# Altium PCB PCB.PcbDoc (part 1 of 2)
Units mm, origin at the board's own origin, x right, y up, seen from the top; angles counter-clockwise.
Board outline 180 x 79 mm, 2 copper layers (Top Layer, Bottom Layer); 169 components, 170 nets, 770 pads, 214 vias.
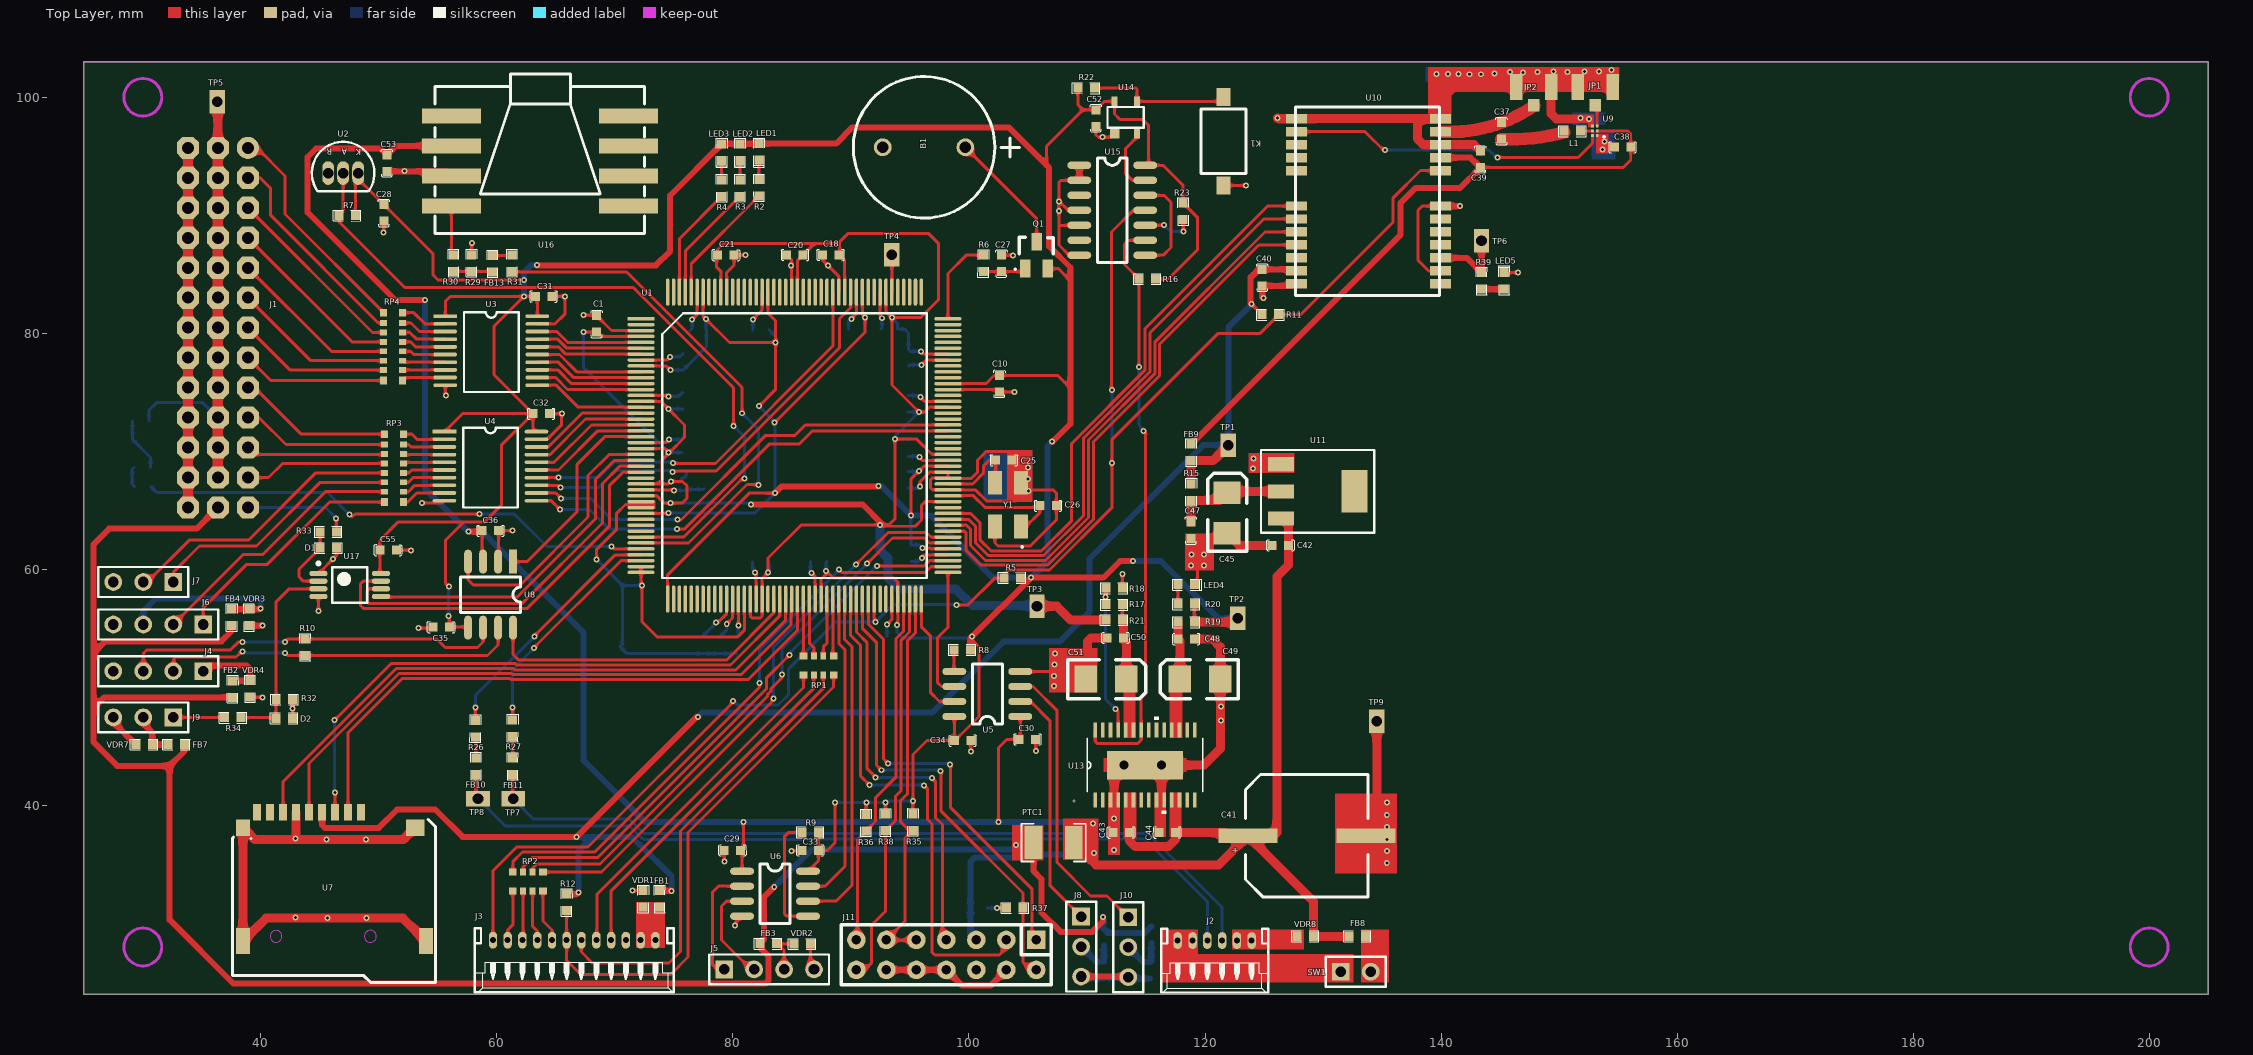
[diagram p0: Top Layer view]
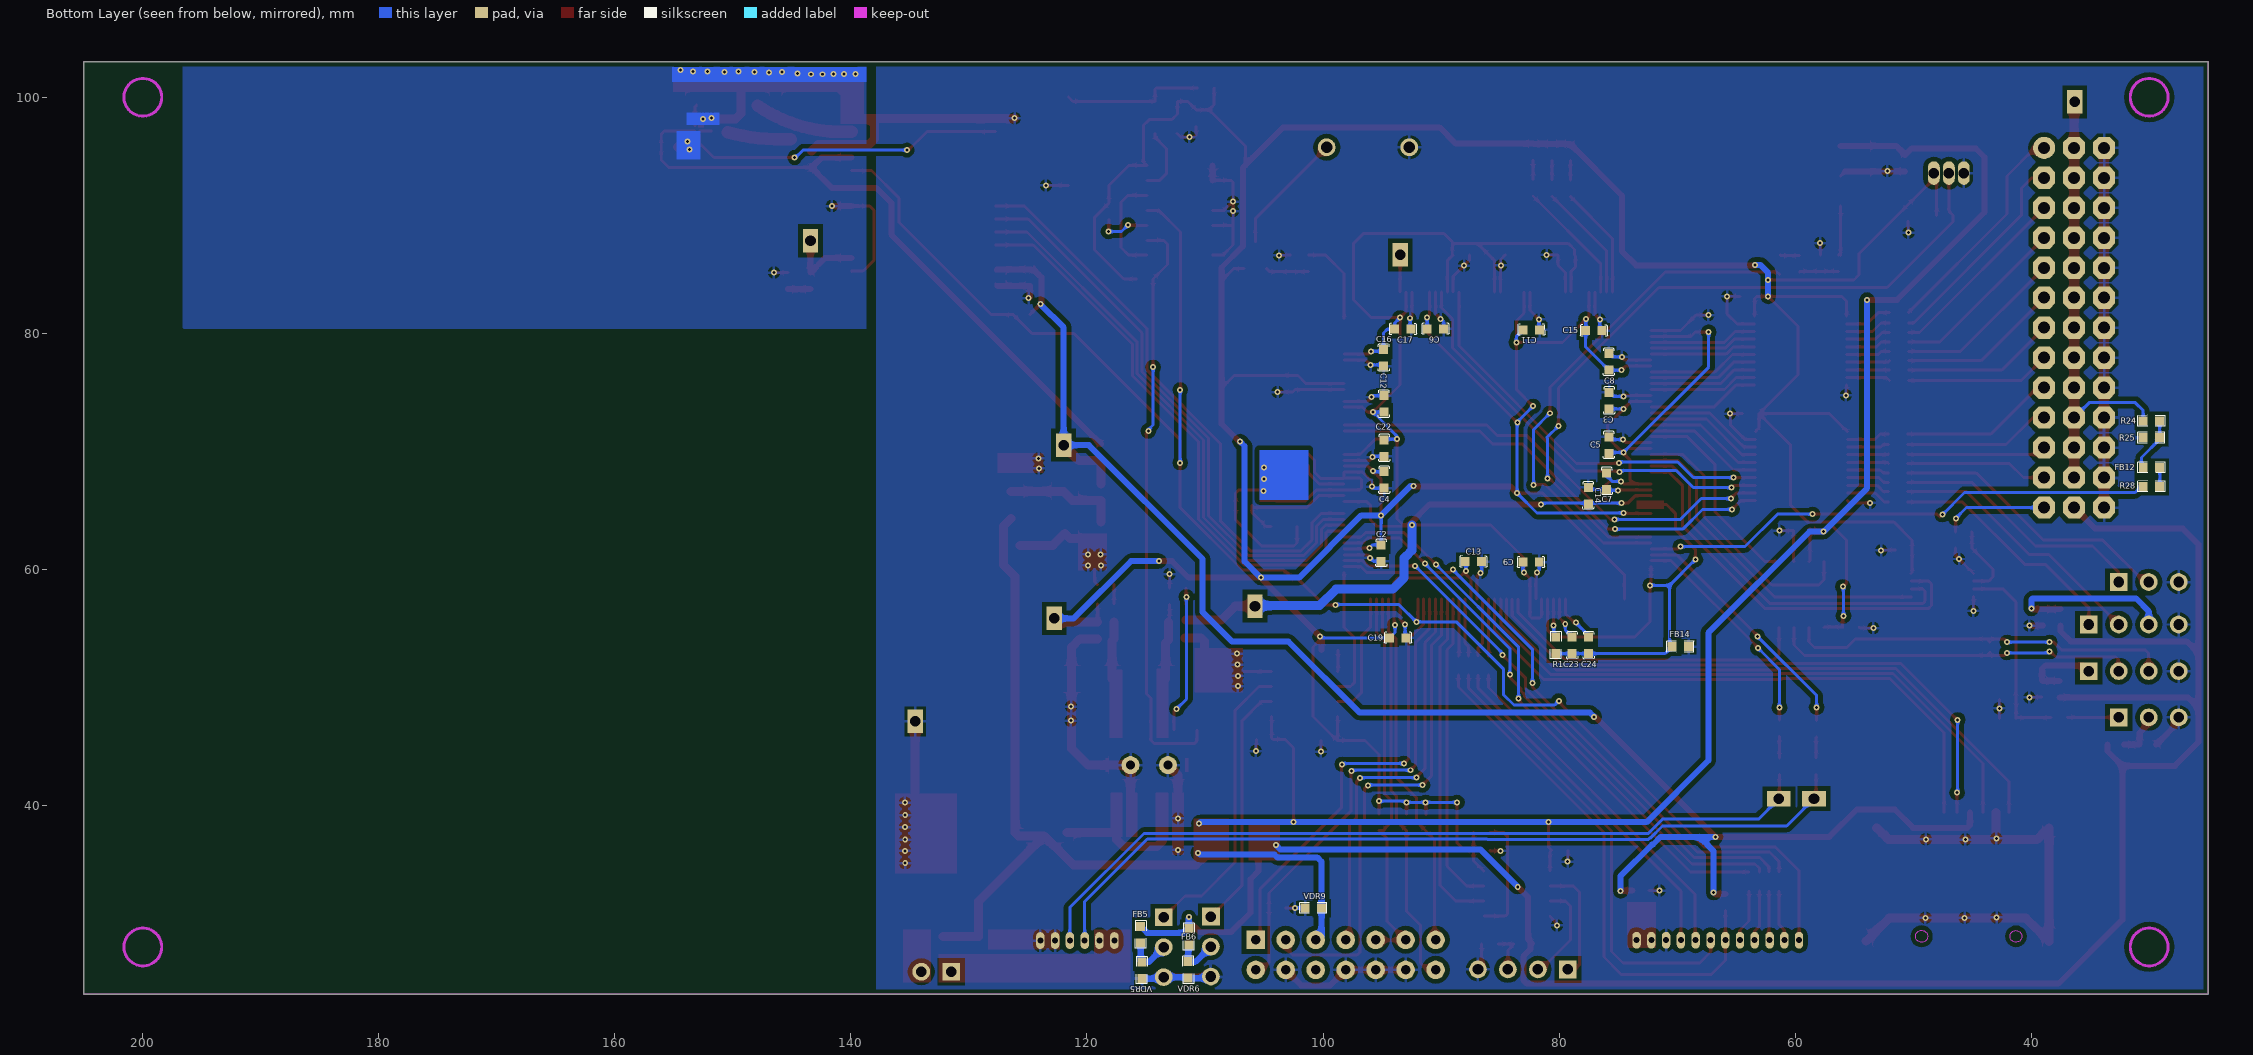
[diagram p1: Bottom Layer view, seen from below]

## Layer stack, top to bottom
Top Solder: solder mask 0.0102, Solder Resist, Dk 3.5
Top Layer: signal copper 0.0356
Dielectric 1: dielectric 0.32, FR-4, Dk 4.8
Bottom Layer: signal copper 0.0356
Bottom Solder: solder mask 0.0102, Solder Resist, Dk 3.5

## Board outline
25,24 205,24 205,103 25,103

## Design rules (kind name [scope] priority, off if disabled: settings)
Clearance [All] p1: gap=0.127
HoleToHoleClearance [All] p1: gap=0.127 allowstackedmicrovias=TRUE
MinimumSolderMaskSliver [All] p1: minsoldermaskwidth=0
PlaneConnect [All] p1: planeconnectstyle=Relief reliefexpansion=0.762 reliefentries=4 reliefconductorwidth=0.762 reliefairgap=0.127
PolygonConnect [All] p1: connectstyle=Relief reliefconductorwidth=0.254 reliefentries=4 polygonreliefangle="90 Angle" airgapwidth=0.254
RoutingVias [All] p1: holewidth=0.381 width=0.635 viastyle="Through Hole" minholewidth=0.254 minwidth=0.508 maxholewidth=0.711 maxwidth=1.27
SilkToSilkClearance [All] p1: silktosilkclearance=0
SilkToSolderMaskClearance [IsPad] p1: minsilkscreentomaskgap=0 clearancetoexposedcopper=TRUE
SolderMaskExpansion [All] p1: expansion=0.102
UnpouredPolygon [All] p1: allowunpoured=FALSE
Width [All] p1: maxlimit=1.27 minlimit=0.127 preferedwidth=0.254
24 further rules are at their usual default settings.

## Classes and differential pairs
component class AD: FB8 R18 R24 R25 R26 R27 R28 U12 U16
component class F28335: B1 C1 C2 C3 C4 C5 C7 C8 C9 C10 C11 C12 C13 C14 C15 C16 C17 C19 C20 C21 C22 C23 C24 C27 C28 FB14 LED1 LED2 LED3 Q1 R1 R2 R3 R4 R5 R6 R7 RP1 U1 U2 Y1
component class GPS: R11
component class IO: J1 TP1 TP2 TP3 TP4 TP5 TP6 TP7 TP8
component class POWER: C41 C42 C43 C44 C45 C46 C49 C52 FB8 K1 LED4 R15 R16 R17 R18 R19 R20 U11 U12 U13 U14 VDR8
component class PWM&CAN&SD: C29 C30 C31 C32 C33 C34 C35 C36 R8 R9 R10 RP3 U3 U4 U5 U6 U7 U8
component class SBUS&JTAG: C55 D1 D2 J11 R33 R34 RP5 U17 U18 VDR9

## Components (designator, comment, footprint, x,y, rotation, side; value= is the part's Value field where it differs from the comment)
B1 "BUZZER" BEEP 99.695,95.758 r180 top
C1 "0.1uF" 0603C 68.45,80.1 r90 top
C2 "0.1uF" 0603C 95.075,62.075 r270 bottom
C3 "0.1uF" 0603C 75.75,73.6 r90 bottom
C4 "0.1uF" 0603C 94.825,68.275 r270 bottom
C5 "0.1uF" 0603C 75.775,69.825 r90 bottom
C6 "0.1uF" 0603C 91.175,80.375 r180 bottom
C7 "0.1uF" 0603C 75.975,68.175 r270 bottom
C8 "0.1uF" 0603C 75.775,76.875 r90 bottom
C9 "0.1uF" 0603C 83.075,60.6 r180 bottom
C10 "0.1uF" 0603C 102.575,76.425 r270 top
C11 "0.1uF" 0603C 83.05,80.3 r180 bottom
C12 "0.1uF" 0603C 94.85,73.325 r90 bottom
C13 "0.1uF" 0603C 87.95,60.65 r180 bottom
C14 "0.1uF" 0603C 77.525,65.55 r90 bottom
C15 "0.1uF" 0603C 77.75,80.225 r180 bottom
C16 "0.1uF" 0603C 94.875,78.625 r270 bottom
C17 "0.1uF" 0603C 93.925,80.35 r180 bottom
C18 "0.1uF" 0603C 88.975,86.65 r180 top
C19 "0.1uF" 0603C 94.35,54.2 r180 bottom
C20 "0.1uF" 0603C 85.95,86.65 r180 top
C21 "0.1uF" 0603C 78.7,86.625 r0 top
C22 "0.1uF" 0603C 94.825,70.975 r270 bottom
C23 "2.2uF" 0603C 78.883,54.26 r270 bottom
C24 "2.2uF" 0603C 77.486,54.26 r270 bottom
C25 "24pF" 0603C 103.65,69.25 r180 top
C26 "24pF" 0603C 107.4,65.4 r180 top
C27 "0.1uF" 0603C 102.743,86.614 r270 top
C28 "0.1uF" 0603C 50.425,89.5 r90 top
C29 "0.1uF" 0603C 79.248,36.195 r0 top
C30 "0.1uF" 0603C 105.65,45.6 r180 top
C31 "0.1uF" 0603C 64.65,83.125 r180 top
C32 "0.1uF" 0603C 64.445,73.192 r180 top
C33 "0.1uF" 0603C 85.852,36.195 r0 top
C34 "0.1uF" 0603C 100.154,45.498 r180 top
C35 "0.1uF" 0603C 54.575,55.1 r0 top
C36 "0.1uF" 0603C 60.15,63.275 r180 top
C37 "1nF" 0603C 145.125,96.45 r90 top
C38 "0.1uF" 0603C 156.075,95.775 r180 top
C39 "0.1uF" 0603C 143.325,94.05 r90 top
C40 "0.1uF" 0603C 124.85,84.025 r90 top
C41 "470uF/16V" 10*10/G/470uF 128.626,37.419 r180 top
C42 "0.1uF" 0603C 125.686,62.034 r0 top
C43 "0.1uF" 0603C 112.2,37.7 r0 top
C44 "10uF" 0603C 116.1,37.7 r0 top
C45 "22uF/6.3V" 3528/B 121.876,63.05 r90 top
C47 "0.1uF" 0603C 118.8,62.6 r90 top
C48 "0.1uF" 0603C 119.1,54.1 r180 top
C49 "10uF/6.3V" 3528/B 121.3,50.7 r180 top
C50 "0.1uF" 0603C 111.7,54.2 r0 top
C51 "10uF/6.3V" 3528/B 109.9,50.7 r0 top
C52 "0.1uF" 0603C 110.744,97.536 r90 top
C53 "0.1uF" 0603C 50.673,93.726 r90 top
C55 "0.1uF" 0603C 50.075,61.625 r0 top
D1 "82306050029" 0603R 45.025,61.8 r0 top
D2 "82306050029" 0603R 41.272,47.375 r0 top
FB1 "742792625" 0603-FB 73.787,32.067 r90 top
FB2 "742792625" 0603-FB 37.6,49.85 r270 top
FB3 "742792625" 0603-FB 82.975,28.275 r180 top
FB4 "742792625" 0603-FB 37.525,55.925 r270 top
FB5 "742792625" 0603-FB 115.45,29.05 r90 bottom
FB6 "742792625" 0603-FB 111.375,28.875 r90 bottom
FB7 "742792625" 0603-FB 32.837,45.149 r0 top
FB8 "742792625" 0603-FB 132.901,28.9 r180 top
FB9 "742792625" 0603-FB 118.828,69.908 r90 top
FB10 "742792625" 0603-FB 58.225,43.325 r90 top
FB11 "742792625" 0603-FB 61.332,43.306 r90 top
FB12 "742792625" 0603-FB 29.8,68.625 r180 bottom
FB13 "742792625" 0603-FB 59.628,85.888 r90 top
FB14 "742792625" 0603-FB 69.725,53.45 r0 bottom
J1 "HEAD3X12" 3X13RA 24.638,79.248 r0 top
J2 "POWER_5V" 53048-06 120.777,27.178 r180 top
J3 "iSensor" 53048-12 66.548,28.575 r180 top
J4 "UART" SIP4 35.115,51.375 r180 top
J5 "I2C" SIP4 79.252,26.098 r0 top
J6 "UART" SIP4 35.115,55.325 r180 top
J7 "UART" SIP3 32.575,58.925 r180 top
J8 "CAP1" SIP3 109.5,30.575 r270 top
J9 "UART" SIP3 32.575,47.45 r180 top
J10 "CAP2" SIP3 113.5,30.525 r270 top
J11 "JTAG" IDC14 105.7,28.6 r270 top
JP1 "ANTINA(NC)" IPEX-20279-00E-03 150.495,98.552 r270 top
JP2 "ANTINA(NC)" IPEX-20279-00E-03 145.288,98.552 r270 top
K1 "RESET_Key" "3*6*2.5 SMD" 121.575,92.525 r90 top
L1 "7.5nH/LQP18M" 0603L 151.13,97.128 r180 top
LED1 "RED" 0603D 82.201,96.076 r270 top
LED2 "GRREN" 0603D 80.6,96.051 r270 top
LED3 "BLUE" 0603D 79.05,96.05 r270 top
LED4 "RED" 0603D 117.708,58.698 r0 top
LED5 "BLUE" 0603D 145.345,83.743 r90 top
PTC1 "0ZCH0150FF2E" 1210 108.875,36.85 r180 top
Q1 "8550" SOT23-PNP 104.775,85.471 r0 top
R1 "24.9K/1%" 0603R 80.28,52.863 r90 bottom
R2 "1K" 0603R 82.201,91.631 r90 top
R3 "1K" 0603R 80.6,91.606 r90 top
R4 "1K" 0603R 79.05,91.605 r90 top
R5 "10K" 0603R 102.95,59.275 r0 top
R6 "1K" 0603R 101.219,86.614 r270 top
R7 "10K" 0603R 48,89.975 r180 top
R8 "10K" 0603R 98.725,53.175 r0 top
R9 "10K" 0603R 85.852,37.719 r0 top
R10 "120" 0603R 43.75,52.7 r90 top
R11 "10K" 0603R 124.85,81.575 r0 top
R12 "10K" 0603R 65.9,32.475 r270 top
R15 "0" 0603R 118.828,67.241 r270 top
R16 "10K" 0603R 114.4,84.6 r0 top
R17 "18.2K/1%" 0603R 113,57 r180 top
R18 "30.1K/1%" 0603R 113,58.4 r180 top
R19 "0" 0603R 119.105,55.523 r180 top
R20 "10K" 0603R 117.708,57.047 r0 top
R21 "0" 0603R 111.6,55.7 r0 top
R22 "10K" 0603R 110.625,100.775 r180 top
R23 "10K" 0603R 118.15,89.625 r90 top
R24 "2K/0.1%" 0603R 30.5,72.575 r180 bottom
R25 "1K/0.1%" 0603R 29.125,71.15 r0 bottom
R26 "10K/0.1%" 0603R 58.175,47.2 r270 top
R27 "10K/0.1%" 0603R 61.331,47.241 r270 top
R28 "10K/0.1%" 0603R 30.5,67.025 r180 bottom
R29 "1K/0.1%" 0603R 57.85,86.65 r270 top
R30 "667/0.1%" 0603R 56.326,85.253 r90 top
R31 "10K/0.1%" 0603R 61.279,85.253 r90 top
R32 "10K" 0603R 41.302,48.971 r0 top
R33 "220" 0603R 46.4,63.175 r180 top
R34 "220" 0603R 36.928,47.425 r0 top
R35 "10K" 0603R 95.25,39.275 r270 top
R36 "10K" 0603R 91.275,39.225 r270 top
R37 "10K" 0603R 103.2,31.3 r0 top
R38 "10K" 0603R 92.925,39.25 r270 top
R39 "1K" 0603R 143.44,83.743 r90 top
RP1 "YC164/220" YC164 85.979,51.054 r0 top
RP2 "YC164/220" YC164 61.35,32.75 r0 top
RP3 "YC248/120" YC248 51.275,68.575 r270 top
RP4 "YC248/220" YC248 51.2,78.875 r270 top
SW1 "SW_POWER" SIP2 131.5,25.9 r0 top
TP1 "PAD" test 122,70.475 r0 top
TP2 "PAD" test 122.8,55.8 r0 top
TP3 "PAD" test 105.75,56.925 r180 top
TP4 "PAD" test 93.475,86.6 r0 top
TP5 "PAD" test 36.322,99.568 r0 top
TP6 "PAD" test 143.45,87.8 r0 top
TP7 "PAD" test 61.332,40.531 r270 top
TP8 "PAD" test 58.35,40.55 r270 top
TP9 "PAD" test 134.575,47.075 r0 top
U1 "TMS320F28335" LQFP-176 85.217,70.485 r0 top
U2 "DS18B20" TO-92 45.7,93.575 r180 top
U3 "74HC245" SSOP20 55.625,81.45 r0 top
U4 "74HC245" SSOP20 55.555,71.668 r0 top
U5 "NLSX4373" SO8 104.345,47.53 r180 top
U6 "NLSX4373" SO8 80.772,34.417 r0 top
U7 "MICROSD_SPI" microsd 38.481,38.1 r0 top
U8 "MC33901" SOIC-8 59.459,57.856 r270 top
U9 "BGA725L6" BGA725L6 153.035,97.155 r180 top
U10 "ubox-M8N" ublox-M8 133.858,91.186 r0 top
U11 "AMS1117-3.3V" SOT223 134.576,70.162 r270 top
U13 "TPS767D301" TPS767D301 114.914,43.406 r90 top
U14 "IMP811" IMP811 113.284,98.171 r0 top
U15 "74HC08D" SO14 109.347,94.234 r0 top
U16 "MPXV7002DP" MPXV7002DP 56.134,98.425 r0 top
U17 "74LVC2G240" VSSOP-8 47.525,58.675 r0 top
VDR1 "82536040" 0603R 72.39,32.766 r270 top
VDR2 "82536040" 0603R 86.555,28.257 r180 top
VDR3 "82536040" 0603R 39,55.225 r90 top
VDR4 "82536040" 0603R 39.075,49.175 r90 top
VDR5 "82536040" 0603R 115.35,25.325 r90 bottom
VDR6 "82536040" 0603R 111.425,26.75 r270 bottom
VDR7 "82536040" 0603R 29.408,45.149 r0 top
VDR8 "82536040" 0603R 127.8,28.9 r0 top
VDR9 "82536040" 0603R 101.525,31.3 r180 bottom
Y1 "30M" 5032Y 103.3,65.475 r90 top

## Footprints (in the part's own frame and the unit in brackets; to place one, negate y for a bottom-side part, rotate by r counter-clockwise, add the part's x,y. Pads: shape width x height; smd on the part's side, far side on the other; paste and mask are expansions set on the pad)
"3*6*2.5 SMD" [mm]
  rect 1.5x1.2 smd: 1(0,0) 2(7.5,0)
  silkscreen extent 1.02,-1.91 6.48,1.91
3X13RA [mil]
  round 74 hole 40: 1(561.38,648.23)
  oct 74x74 hole 40: 2(461.38,648.23) 3(361.38,648.23) 4(561.38,548.23) 5(461.38,548.23) 6(361.38,548.23) 7(561.38,448.23) 8(461.38,448.23) 9(361.38,448.23) 10(561.38,348.23) 11(461.38,348.23) 12(361.38,348.23) 13(561.38,248.23) 14(461.38,248.23) 15(361.38,248.23) 16(561.38,148.23) 17(461.38,148.23) 18(361.38,148.23) 19(561.38,48.23) 20(461.38,48.23) 21(361.38,48.23) 22(561.38,-51.77) 23(461.38,-51.77) 24(361.38,-51.77) 25(561.38,-151.77) 26(461.38,-151.77) 27(361.38,-151.77) 28(561.38,-251.77) 29(461.38,-251.77) 30(361.38,-251.77) 31(561.38,-351.77) 32(461.38,-351.77) 33(361.38,-351.77) 34(561.38,-451.77) 35(461.38,-451.77) 36(361.38,-451.77) 37(561.38,-551.77) 38(461.38,-551.77) 39(361.38,-551.77)
10*10/G/470uF [mm]
  rect 5x1.2 smd: 1(5,0) 2(-5,0)
  silkscreen extent -5.2,-5.2 5.2,5.2
0603-FB [mil]
  rect 30x30 smd: 1(-27.5,0) 2(27.5,0)
  silkscreen extent -46,-18 46,18
0603C [mil]
  rect 30x30 smd: 1(0,0) 2(55,0)
  silkscreen extent -19,-18 73,19
0603D [mil]
  rect 30x30 smd: 1(0,0) 2(55,0)
  silkscreen extent -18,-18 79,18
0603L [mil]
  rect 30x30 smd: 1(-27.5,0) 2(27.5,0)
  silkscreen extent -46,-18 46,18
0603R [mil]
  rect 30x30 smd: 1(0,0) 2(55,0)
  silkscreen extent -18,-18 73,18
1210 [mm]
  rect 1.5x2.8 smd: 1(0,0) 2(3.4,0)
  silkscreen extent -1.02,-1.6 4.42,1.6
3528/B [mil]
  rect 75x90 smd: 1(135,0) 2(0,0)
  silkscreen extent -60,-65 200,65
5032Y [mm]
  rect 2x1.2 smd: 1(-1.85,-1.1) 2(-1.85,1.1) 3(1.85,1.1) 4(1.85,-1.1)
  silkscreen extent -3.6,-1.23 -3.56,-1.18
53048-06 [mil]
  oval 28x56 hole 20: 1(122.03,-53.7) 2(72.03,-53.7) 3(23.03,-53.7) 4(-26.57,-53.7) 5(-75.79,-53.7) 6(-125,-53.7)
  silkscreen extent -180,-93 177,120
53048-12 [mil] "1.25"
  oval 28x56 hole 20: 1(270.93,0) 2(221.93,0) 3(172.93,0) 4(122.93,0) 5(73.93,0) 6(24.93,0) 7(-24.07,0) 8(-74.07,0) 9(-123.29,0) 10(-172.5,0) 11(-221.71,0) 12(-270.93,0)
  silkscreen extent -332,-39 332,173
BEEP [mm]
  round 1.5 hole 1: 1(0.004,-0.004) 2(7.004,-0.004)
  silkscreen extent -4.6,-6 9.5,6
BGA725L6 [mm]
  rect 0.25x0.25 smd: 1(-0.2,0.4) 2(-0.2,0) 3(-0.2,-0.4) 4(0.2,-0.4) 5(0.2,0) 6(0.2,0.4)
  silkscreen extent -0.8,0.48 -0.75,0.53, body extent -0.35,-0.55 0.35,0.55, height 0.4
IDC14 [mil]
  rect 62x62 hole 32: 1(0,0)
  round 62 hole 32: 2(100,0) 3(0,-100) 4(100,-100) 5(0,-200) 6(100,-200) 7(0,-300) 8(100,-300) 9(0,-400) 10(100,-400) 11(0,-500) 12(100,-500) 13(0,-600) 14(100,-600)
  silkscreen extent -50,-650 150,50
IMP811 [mm]
  rect 0.8x0.8 smd: 1(-0.923,-1.25)
  rect 0.5x0.8 smd: 2(0.952,-1.25) 3(0.952,1.475) 4(-0.948,1.475)
  silkscreen extent -1.55,-0.77 1.53,1
IPEX-20279-00E-03 [mm]
  rect 2.2x1.05 smd: 1(-2.3,4.05) 1(-2.3,1.1)
  rect 1.05x1 smd: 2(-0.775,2.575)
LQFP-176 [mm]
  rect 2.3x0.3 smd: 1(-13,10.75)
  oval 2.3x0.3 smd: 2(-13,10.25) 3(-13,9.75) 4(-13,9.25) 5(-13,8.75) 6(-13,8.25) 7(-13,7.75) 8(-13,7.25) 9(-13,6.75) 10(-13,6.25) 11(-13,5.75) 12(-13,5.25) 13(-13,4.75) 14(-13,4.25) 15(-13,3.75) 16(-13,3.25) 17(-13,2.75) 18(-13,2.25) 19(-13,1.75) 20(-13,1.25) 21(-13,0.75) 22(-13,0.25) 23(-13,-0.25) 24(-13,-0.75) 25(-13,-1.25) 26(-13,-1.75) 27(-13,-2.25) 28(-13,-2.75) 29(-13,-3.25) 30(-13,-3.75) 31(-13,-4.25) 32(-13,-4.75) 33(-13,-5.25) 34(-13,-5.75) 35(-13,-6.25) 36(-13,-6.75) 37(-13,-7.25) 38(-13,-7.75) 39(-13,-8.25) 40(-13,-8.75) 41(-13,-9.25) 42(-13,-9.75) 43(-13,-10.25) 44(-13,-10.75) 89(13,-10.75) 90(13,-10.25) 91(13,-9.75) 92(13,-9.25) 93(13,-8.75) 94(13,-8.25) 95(13,-7.75) 96(13,-7.25) 97(13,-6.75) 98(13,-6.25) 99(13,-5.75) 100(13,-5.25) 101(13,-4.75) 102(13,-4.25) 103(13,-3.75) 104(13,-3.25) 105(13,-2.75) 106(13,-2.25) 107(13,-1.75) 108(13,-1.25) 109(13,-0.75) 110(13,-0.25) 111(13,0.25) 112(13,0.75) 113(13,1.25) 114(13,1.75) 115(13,2.25) 116(13,2.75) 117(13,3.25) 118(13,3.75) 119(13,4.25) 120(13,4.75) 121(13,5.25) 122(13,5.75) 123(13,6.25) 124(13,6.75) 125(13,7.25) 126(13,7.75) 127(13,8.25) 128(13,8.75) 129(13,9.25) 130(13,9.75) 131(13,10.25) 132(13,10.75)
  oval 0.3x2.3 smd: 45(-10.75,-13) 46(-10.25,-13) 47(-9.75,-13) 48(-9.25,-13) 49(-8.75,-13) 50(-8.25,-13) 51(-7.75,-13) 52(-7.25,-13) 53(-6.75,-13) 54(-6.25,-13) 55(-5.75,-13) 56(-5.25,-13) 57(-4.75,-13) 58(-4.25,-13) 59(-3.75,-13) 60(-3.25,-13) 61(-2.75,-13) 62(-2.25,-13) 63(-1.75,-13) 64(-1.25,-13) 65(-0.75,-13) 66(-0.25,-13) 67(0.25,-13) 68(0.75,-13) 69(1.25,-13) 70(1.75,-13) 71(2.25,-13) 72(2.75,-13) 73(3.25,-13) 74(3.75,-13) 75(4.25,-13) 76(4.75,-13) 77(5.25,-13) 78(5.75,-13) 79(6.25,-13) 80(6.75,-13) 81(7.25,-13) 82(7.75,-13) 83(8.25,-13) 84(8.75,-13) 85(9.25,-13) 86(9.75,-13) 87(10.25,-13) 88(10.75,-13) 133(10.75,13) 134(10.25,13) 135(9.75,13) 136(9.25,13) 137(8.75,13) 138(8.25,13) 139(7.75,13) 140(7.25,13) 141(6.75,13) 142(6.25,13) 143(5.75,13) 144(5.25,13) 145(4.75,13) 146(4.25,13) 147(3.75,13) 148(3.25,13) 149(2.75,13) 150(2.25,13) 151(1.75,13) 152(1.25,13) 153(0.75,13) 154(0.25,13) 155(-0.25,13) 156(-0.75,13) 157(-1.25,13) 158(-1.75,13) 159(-2.25,13) 160(-2.75,13) 161(-3.25,13) 162(-3.75,13) 163(-4.25,13) 164(-4.75,13) 165(-5.25,13) 166(-5.75,13) 167(-6.25,13) 168(-6.75,13) 169(-7.25,13) 170(-7.75,13) 171(-8.25,13) 172(-8.75,13) 173(-9.25,13) 174(-9.75,13) 175(-10.25,13) 176(-10.75,13)
  silkscreen extent -11.21,-11.21 11.21,11.21
microsd [mm]
  rect 0.7x1.4 smd: 1(10,1.3) 2(8.9,1.3) 3(7.8,1.3) 4(6.7,1.3) 5(5.6,1.3) 6(4.5,1.3) 7(3.4,1.3) 8(2.3,1.3) 9(1.2,1.3)
  rect 1.2x1.4 smd: 10(0,0)
  rect 1.2x2.2 smd: 10(0,-9.6) 10(15.5,-9.6)
  rect 1.6x1.4 smd: 10(14.6,0)
  Keep-Out Layer circle w0.05: c10.8,-9.2 r0.51
  Keep-Out Layer circle w0.05: c2.8,-9.2 r0.5
  silkscreen extent -0.9,-13.1 16.3,0.7
MPXV7002DP [mm]
  rect 5x1.27 smd: 1(0,0) 2(0,-2.54) 3(0,-5.08) 4(0,-7.62) 5(15,-7.62) 6(15,-5.08) 7(15,-2.54) 8(15,0)
  silkscreen extent -1.39,-9.97 16.39,3.54
SIP2 [mm]
  rect 1.5x1.5 hole 0.9: 1(0,0)
  round 1.5 hole 0.9: 2(2.54,0)
  silkscreen extent -1.27,-1.27 3.81,1.27
SIP3 [mm]
  rect 1.5x1.5 hole 0.9: 1(0,0)
  round 1.5 hole 0.9: 2(2.54,0) 3(5.08,0)
  silkscreen extent -1.27,-1.27 6.35,1.27
SIP4 [mm]
  rect 1.5x1.5 hole 0.9: 1(0,0)
  round 1.5 hole 0.9: 2(2.54,0) 3(5.08,0) 4(7.62,0)
  silkscreen extent -1.27,-1.27 8.89,1.27
SO8 [mil]
  oval 80x24 smd: 1(0,0) 2(0,-50) 3(0,-100) 4(0,-150) 5(220,-150) 6(220,-100) 7(220,-50) 8(220,0)
  silkscreen extent 60,-175 160,25
SO14 [mil]
  oval 80x24 smd: 1(0,0) 2(0,-50) 3(0,-100) 4(0,-150) 5(0,-200) 6(0,-250) 7(0,-300) 8(220,-300) 9(220,-250) 10(220,-200) 11(220,-150) 12(220,-100) 13(220,-50) 14(220,0)
  silkscreen extent 60,-325 160,25
SOIC-8 [mm]
  rect 2.03x0.66 smd: 1(-2.795,1.905)
  oval 2.03x0.66 smd: 2(-2.795,0.635) 3(-2.795,-0.635) 4(-2.795,-1.905) 5(2.795,-1.905) 6(2.795,-0.635) 7(2.795,0.635) 8(2.795,1.905)
  silkscreen extent -1.5,-2.54 1.5,2.54
SOT23-PNP [mil]
  rect 36x60 smd: 1(0,0) 2(75,0) 3(38,90)
  silkscreen extent -34,-2 93,105
SOT223 [mm]
  rect 1.2x2.2 smd: 1(1.256,-8.128) 2(3.556,-8.128) 3(5.856,-8.128)
  rect 3.6x2.2 smd: ""(3.556,-1.928)
  silkscreen extent 0.06,-9.83 7.06,-0.23
SSOP20 [mm]
  rect 2x0.32 smd: 1(0,0)
  oval 2x0.32 smd: 2(0,-0.65) 3(0,-1.3) 4(0,-1.95) 5(0,-2.6) 6(0,-3.25) 7(0,-3.9) 8(0,-4.55) 9(0,-5.2) 10(0,-5.85) 11(7.796,-5.85) 12(7.796,-5.2) 13(7.796,-4.55) 14(7.796,-3.9) 15(7.796,-3.25) 16(7.796,-2.6) 17(7.796,-1.95) 18(7.796,-1.3) 19(7.796,-0.65) 20(7.796,0)
  silkscreen extent 1.58,-6.43 6.21,0.33
test [mm]
  rect 1.3x2 hole 0.9: 1(-0.019,0.043)
TO-92 [mm]
  oval 1x2 hole 0.9: 1(0,0) 2(-1.27,0) 3(-2.54,0)
  silkscreen extent -3.92,-2.65 1.38,1.55
TPS767D301 [mil]
  rect 50x12 smd: 1(-117,166.34) 2(-117,140.75) 3(-117,115.16) 4(-117,89.57) 5(-117,63.98) 6(-117,38.39) 7(-117,12.8) 8(-117,-12.8) 9(-117,-38.39) 10(-117,-63.98) 11(-117,-89.57) 12(-117,-115.16) 13(-117,-140.75) 14(-117,-166.34) 15(117,-166.34) 16(117,-140.75) 17(117,-115.16) 18(117,-89.57) 19(117,-63.98) 20(117,-38.39) 21(117,-12.8) 22(117,12.8) 23(117,38.39) 24(117,63.98) 25(117,89.57) 26(117,115.16) 27(117,140.75) 28(117,166.34)
  rect 94.49x254.33 smd: 29(0,0)
  Top Layer region: 22.64,127.17 -22.64,127.17 -22.64,137.01 22.64,137.01
  Top Layer region: 22.64,-127.17 -22.64,-127.17 -22.64,-137.01 22.64,-137.01
  silkscreen extent -162,-193 162,193, body extent -130,-193 130,193, height 67
ublox-M8 [mm]
  rect 1.8x0.8 smd: 1(6.1,-7) 2(6.1,-5.9) 3(6.1,-4.8) 4(6.1,-3.7) 5(6.1,-2.6) 6(6.1,-1.5) 7(6.1,-0.4) 8(6.1,2.6) 9(6.1,3.7) 10(6.1,4.8) 11(6.1,5.9) 12(6.1,7) 13(-6.1,7) 14(-6.1,5.9) 15(-6.1,4.8) 16(-6.1,3.7) 17(-6.1,2.6) 18(-6.1,-0.4) 19(-6.1,-1.5) 20(-6.1,-2.6) 21(-6.1,-3.7) 22(-6.1,-4.8) 23(-6.1,-5.9) 24(-6.1,-7)
  silkscreen extent -6.2,-8 6,8
VSSOP-8 [mm]
  oval 1.55x0.45 smd: 1(-2.65,0.975) 2(-2.65,0.325) 3(-2.65,-0.325) 4(-2.65,-0.975) 5(2.65,-0.975) 6(2.65,-0.325) 7(2.65,0.325) 8(2.65,0.975)
  silkscreen extent -2.77,-1.5 1.48,1.95, body extent -1.5,-1.5 1.5,1.5, height 1.1
YC164 [mm]
  rect 0.65x0.6 smd: 1(0,0) 4(2.55,0) 5(2.55,1.6) 8(0,1.6)
  rect 0.5x0.6 smd: 2(0.875,0) 3(1.675,0) 6(1.675,1.6) 7(0.875,1.6)
YC248 [mm]
  rect 0.65x0.6 smd: 1(-2.875,-0.8) 8(2.875,-0.8) 9(2.875,0.8) 16(-2.875,0.8)
  rect 0.5x0.6 smd: 2(-2,-0.8) 3(-1.2,-0.8) 4(-0.4,-0.8) 5(0.4,-0.8) 6(1.2,-0.8) 7(2,-0.8) 10(2,0.8) 11(1.2,0.8) 12(0.4,0.8) 13(-0.4,0.8) 14(-1.2,0.8) 15(-2,0.8)

## Part data
B1: "Buzzer"
C1 C2 C3 C4 C5 C6 C7 C8 C9 C10 C11 C12 C13 C14 C15 C16 C17 C18 C19 C20 C21 C22 C23 C24 C25 C26 C27 C28 C29 C30 C31 C32 C33 C34 C35 C36 C37 C38 C39 C40 C42 C43 C44 C47 C48 C50 C52 C53 C55: library part C
C41 C45 C49 C51: library part C-POLAR
D1 D2: library part DIODE-TVS/Bidirectional
FB1 FB2 FB3 FB4 FB5 FB6 FB7 FB8 FB9 FB10 FB11 FB12 FB13 FB14: library part FB
J2: library part HEAD1X6
J3: library part HEAD2X6
J4 J5 J6: library part HEAD1X4
J7 J8 J9 J10: library part HEAD1X3
J11: library part IDC-14
JP1 JP2: library part ANTINA
L1: library part L
LED1 LED2 LED3 LED4 LED5: library part LED
PTC1: library part PTC
Q1: library part PNP, "PNP Transistor"
R1 R2 R3 R4 R5 R6 R7 R8 R9 R10 R11 R12 R15 R16 R17 R18 R19 R20 R21 R22 R23 R24 R25 R26 R27 R28 R29 R30 R31 R32 R33 R34 R35 R36 R37 R38 R39: library part R
RP1 RP2: library part RP-4
RP3 RP4: library part RP
U11: library part AS1117M3-3.3V, "5V-3.3V"
U15: "2-INPUT AND GATE"
VDR1 VDR2 VDR3 VDR4 VDR5 VDR6 VDR7 VDR8 VDR9: library part Varistor
Y1: library part CRYSTAL, "Crystal"

## Free pads (board coordinates)
  round 1.524 hole 0.762: 0(113.136,43.406) 1(116.311,43.406)

## Via types
v1: diameter 0.508, hole 0.254, Top Layer to Bottom Layer, 214 vias

## Nets (pads, with @x,y where several pads share a name; then routed paths per layer and width w, separated by ;. In a path a pad name is that pad's centre, name@x,y a point inside that pad or via, vN(x,y) a via of type N, cw(c..) or ccw(c..) an arc to the next point about the centre after c; other vN are vias at no path point)
AGND: C23.2 C24.2 FB14.2 R1.1 U1.32 U1.33 U1.43 U1.44 U1.58 | length 44
  Top Layer w0.254: v1@68.45,60.775 v1(68.45,60.825) 68.45,61.7 70.15,63.4 70.15,64.75 70.9,65.5 72.217,65.5 ; U1.43@72.217,60.235 U1.44@72.217,59.735 72.217,58.708 v1(72.275,58.65) 72.275,55.575 73.575,54.275 80.4,54.275 80.967,54.842 U1.58@80.967,57.485
  Bottom Layer w0.254: v1(68.45,60.825) 70.625,58.65 ; v1(72.275,58.65) 70.625,58.65 ; R1.1@80.28,52.863 C23.2@78.883,52.863 C24.2@77.486,52.863 71.01,52.863 FB14.2@70.423,53.45 70.625,53.651 70.625,58.65
BAT2S_VOLT: J1.2 J1.5 J1.8 J1.11 J1.14 J1.17 J1.20 J1.23 J1.26 J1.29 J1.32 J1.35 R24.1 TP5.1 | length 39.4
  Top Layer w0.762: TP5.1@36.303,99.611 36.357,99.557 J1.2@36.357,95.713 J1.5@36.357,93.173 J1.8@36.357,90.633 J1.11@36.357,88.093 J1.14@36.357,85.553 J1.17@36.357,83.013 J1.20@36.357,80.473 J1.23@36.357,77.933 J1.26@36.357,75.393 J1.29@36.357,72.853 J1.32@36.357,70.313 J1.35@36.357,67.773
  Bottom Layer w0.254: R24.1@30.5,72.575 30.5,73.45 31.175,74.125 35.085,74.125 J1.29@36.357,72.853
BAT6S_VOLT_SENSE: FB11.1 J2.4 TP7.1 | length 68.8
  Top Layer w0.254: FB11.1@61.332,42.607 61.332,40.593 TP7.1@61.375,40.55
  Bottom Layer w0.254: TP7.1@61.375,40.55 63.1,38.825 71.232,38.825 72.432,37.625 115.175,37.625 121.452,31.348 J2.4@121.452,28.542
BAT_CURRENT_SENSE: FB10.1 J2.3 TP8.1 | length 70.9
  Top Layer w0.254: FB10.1@58.225,42.626 58.225,40.737 TP8.1@58.393,40.569
  Bottom Layer w0.254: TP8.1@58.393,40.569 60.712,38.25 71.232,38.25 72.264,37.219 72.336,37.219 72.429,37.125 86.082,37.125 86.115,37.158 114.892,37.158 120.192,31.858 J2.3@120.192,28.542
BATT2S_VOLT_SENSE: R28.1 U1.40 | length 44
  Top Layer w0.254: v1(47.525,64.625) 47.725,64.425 47.975,64.675 v1(58.525,64.675) ; v1(69.725,61.925) 69.915,61.735 U1.40@72.217,61.735
  Bottom Layer w0.254: R28.1@30.675,67.025 31.2,66.5 45.65,66.5 v1@47.6,64.55 ; v1(58.525,64.675) 61.5,64.675 64.25,61.925 v1(69.725,61.925)
BATT6S_VOLT_SENSE: R27.1 U1.42 | length 19
  Top Layer w0.254: v1(61.325,48.275) 61.331,48.269 R27.1@61.331,47.241 ; v1(63.15,53.325) 63.15,53.375 70.51,60.735 U1.42@72.217,60.735
  Bottom Layer w0.254: v1(61.325,48.275) 61.325,51.5 v1(63.15,53.325)
BATT_CURRENT_SENSE: R26.1 U1.41 | length 21.1
  Top Layer w0.254: R26.1@58.175,47.2 v1(58.175,48.3) ; v1(63.2,54.325) 63.2,54.4 70.035,61.235 U1.41@72.217,61.235
  Bottom Layer w0.254: v1(58.175,48.3) 58.175,49.3 v1(63.2,54.325)
CANRXA: 
CANRXB: U1.24 U8.4 | length 23
  Top Layer w0.254: U8.4@57.554,60.651 57.554,59.121 58,58.675 61.975,58.675 67.725,64.425 67.725,67.95 69.51,69.735 U1.24@72.217,69.735
CANSTB: U1.63 U8.8 | length 27.4
  Top Layer w0.254: U8.8@61.364,55.061 61.364,52.789 61.853,52.3 79.45,52.3 83.467,56.317 U1.63@83.467,57.485
CANTH: J4.2 R10.1 U8.7 | length 31.1
  Top Layer w0.254: J4.2@32.575,51.375 32.625,51.425 32.625,52.4 32.8,52.575 37.9,52.575 v1@38.4,53.075 ; v1(42.05,52.925) 42.275,52.7 R10.1@43.75,52.7 ; R10.1@43.475,52.975 R10.1@43.75,52.7 ; U8.7@60.094,55.061 60.094,53.594 59.2,52.7 R10.1@43.75,52.7
  Bottom Layer w0.254: v1(38.425,53.025) 38.525,52.925 v1(42.05,52.925)
CANTL: J4.3 R10.2 U8.6 | length 32.9
  Top Layer w0.254: J4.3@30.035,51.375 30.035,52.86 30.35,53.175 37.425,53.175 38.075,53.825 v1@38.45,53.825 ; v1@42.003,53.825 v1(42.025,53.825) 42.297,54.097 R10.2@43.75,54.097 ; R10.2@43.478,53.825 R10.2@43.75,54.097 ; U8.6@58.824,55.061 58.824,53.849 58.35,53.375 55.625,53.375 54.903,54.097 R10.2@43.75,54.097
  Bottom Layer w0.254: v1(38.425,53.825) v1(42.025,53.825)
CANTXA: 
CANTXB: U1.21 U8.1 | length 17.6
  Top Layer w0.254: U8.1@61.364,60.651 62.551,60.651 66.8,64.9 66.8,68.9 69.135,71.235 U1.21@72.217,71.235
CAP1: J8.1 U5.2 | length 20.9
  Top Layer w0.254: U5.2@104.345,48.8 105.225,48.8 106.85,47.175 106.85,33.225 J8.1@109.5,30.575
CAP2: J10.1 U5.3 | length 24.8
  Top Layer w0.254: U5.3@104.345,50.07 105.43,50.07 107.475,48.025 107.475,35.15 110.3,32.325 111.7,32.325 J10.1@113.5,30.525
DSP_RST: J3.1 R5.1 R11.2 U1.80 U10.8 U15.11 | length 142.5
  Top Layer w0.254: J3.1@59.666,28.575 59.666,34.466 61.675,36.475 67.725,36.475 v1@80.125,48.875 ; U1.80@91.967,57.485 91.967,55.683 v1(92.1,55.55) ; v1(98.95,56.975) 99.9,56.975 102.175,59.25 102.625,59.25 R5.1@102.9,59.525 ; R5.1@102.95,59.275 102.95,59.575 103.301,59.926 106.701,59.926 106.718,59.943 106.826,59.943 112.1,65.217 v1(112.1,69.025) 112.1,70.975 121.125,80 124.672,80 R11.2@126.247,81.575 128.1,81.575 135.95,89.425 135.95,91.475 138.261,93.786 U10.8@139.958,93.786 ; v1@112.1,75.125 112.075,75.15 112.075,88.575 113.924,90.424 U15.11@114.935,90.424
  Bottom Layer w0.254: v1(80.025,48.85) 80.375,48.5 83.825,48.5 84.725,49.4 84.725,51.575 88.7,55.55 v1(92.1,55.55) 93.575,57.025 98.9,57.025 v1@98.925,57 ; v1(112.1,69.025) v1(112.1,75.2)
ECAP5: U1.88 U5.7 | length 10.6
  Top Layer w0.254: U1.88@95.967,57.485 95.967,55.133 96.725,54.375 96.725,49.575 97.5,48.8 U5.7@98.757,48.8
ECAP6: U1.89 U5.6 | length 11.2
  Top Layer w0.254: U1.89@98.217,59.735 98.217,55.092 97.35,54.225 97.35,50.4 97.68,50.07 U5.6@98.757,50.07
EMU0: J11.13 R36.2 U1.85 | length 31.1
  Top Layer w0.254: J11.13@90.56,28 90.56,37.113 R36.2@91.275,37.828 92.075,38.628 92.075,40.65 93.8,42.375 93.8,54.1 94.467,54.767 U1.85@94.467,57.485
EMU1: J11.14 R38.2 U1.86 | length 33.9
  Top Layer w0.254: J11.14@90.56,25.46 91.725,26.625 91.725,29.825 92.925,31.025 R38.2@92.925,37.853 93.775,38.703 93.775,40.775 94.225,41.225 94.225,53.95 94.967,54.692 U1.86@94.967,57.485
EPWM1A: U1.5 U3.18 | length 9.2
  Top Layer w0.254: U3.18@63.421,80.15 65.074,80.15 65.989,79.235 U1.5@72.217,79.235
EPWM1B: U1.6 U3.17 | length 9.1
  Top Layer w0.254: U3.17@63.421,79.5 65.149,79.5 65.914,78.735 U1.6@72.217,78.735
EPWM2A: U1.7 U3.16 | length 9.1
  Top Layer w0.254: U3.16@63.421,78.85 65.225,78.85 65.84,78.235 U1.7@72.217,78.235
EPWM2B: U1.10 U3.15 | length 9.4
  Top Layer w0.254: U3.15@63.421,78.2 65.3,78.2 66.765,76.735 U1.10@72.217,76.735
EPWM3A: U1.11 U3.14 | length 9.3
  Top Layer w0.254: U3.14@63.421,77.55 65.2,77.55 66.515,76.235 U1.11@72.217,76.235
EPWM3B: U1.12 U3.13 | length 9.3
  Top Layer w0.254: U3.13@63.421,76.9 65.15,76.9 66.315,75.735 U1.12@72.217,75.735
EPWM4A: U1.13 U3.12 | length 9.2
  Top Layer w0.254: U3.12@63.421,76.25 64.975,76.25 65.99,75.235 U1.13@72.217,75.235
EPWM4B: U1.16 U3.11 | length 9.6
  Top Layer w0.254: U3.11@63.421,75.6 65.025,75.6 66.89,73.735 U1.16@72.217,73.735
EPWM5A: U1.17 U4.18 | length 10.1
  Top Layer w0.254: U4.18@63.351,70.368 64.343,70.368 67.21,73.235 U1.17@72.217,73.235
EPWM5B: U1.18 U4.17 | length 10.1
  Top Layer w0.254: U4.17@63.351,69.718 64.493,69.718 67.51,72.735 U1.18@72.217,72.735
EPWM6A: U1.19 U4.16 | length 10.2
  Top Layer w0.254: U4.16@63.351,69.068 64.843,69.068 68.01,72.235 U1.19@72.217,72.235
EPWM6B: U1.20 U4.15 | length 10.2
  Top Layer w0.254: U4.15@63.351,68.418 65.218,68.418 68.535,71.735 U1.20@72.217,71.735
GND: B1.2 C1.2 C2.2 C3.2 C4.2 C5.2 C6.2 C7.2 C8.2 C9.2 C10.2 C11.2 C12.2 C13.2 C14.2 C15.2 C16.2 C17.2 C18.2 C19.2 C20.2 C21.2 C22.2 C25.1 C26.1 C27.1 C28.1 C29.1 C30.1 C31.1 C32.1 C33.1 C34.1 C35.1 C36.1 C38.2 C39.2 C40.1 C41.2 C42.1 C43.1 C44.1 C45.2 C47.1 C48.1 C49.2 C50.1 C51.2 C52.1 C53.1 C55.2 D1.2 D2.2 FB14.1 J1.3 J1.6 J1.9 J1.12 J1.15 J1.18 J1.21 J1.24 J1.27 J1.30 J1.33 J1.36 J1.39 J2.5 J2.6 J3.10 J4.4 J5.4 J6.4 J7.3 J8.3 J9.3 J10.3 J11.4 J11.8 J11.10 J11.12 JP1.1 JP2.1 K1.1 LED4.2 LED5.2 pad.0 pad.1 R18.1 R25.2 R29.1 R32.2 R37.1 TP9.1 U1.3 U1.8 U1.14 U1.22 U1.30 U1.60 U1.70 U1.83 U1.92 U1.103 U1.105 U1.106 U1.108 U1.118 U1.120 U1.125 U1.140 U1.144 U1.147 U1.155 U1.160 U1.166 U1.171 U2.1 U3.10 U3.19 U4.10 U4.19 U5.4 U6.4 U7.6 U7.10 U8.2 U9.1 U9.4 U10.2 U10.7 U10.10 U10.12 U10.13 U10.24 U11.1 U13.3 U13.4 U13.9 U13.10 U13.29 U14.1 U15.1 U15.2 U15.4 U15.5 U15.7 U16.3 U17.1 U17.4 VDR1.1 VDR2.1 VDR3.1 VDR4.1 VDR5.1 VDR6.2 VDR7.1 VDR8.1 VDR9.1 Y1.2 Y1.4 | length 389.1
  Top Layer w0.254: J9.3@27.495,47.062 J9.3@27.495,47.45 ; VDR4.1@39.075,49.175 40.125,49.175 v1(40.15,49.15) ; D2.2@42.669,47.375 42.699,47.405 R32.2@42.699,48.971 ; U17.4@44.875,57.7 44.875,56.5 v1(44.9,56.475) ; U17.1@44.875,59.65 46.422,61.197 D1.2@46.422,61.8 ; v1(50.4,88.525) 50.425,88.55 C28.1@50.425,89.5 ; C55.2@51.472,61.625 52.675,61.625 v1(52.7,61.6) ; v1(53.375,55.025) 54.5,55.025 C35.1@54.575,55.1 ; v1(53.65,65.625) 55.362,65.625 U4.10@55.555,65.818 ; U3.10@55.625,75.6 55.625,74.825 v1(55.7,74.75) ; U16.3@55.753,93.726 U16.3@56.134,93.345 ; R29.1@57.85,86.65 57.85,87.625 v1(57.875,87.65) ; U8.2@60.094,60.651 60.15,60.707 C36.1@60.15,63.275 v1(61.325,63.275) ; U4.19@63.351,71.018 64.268,71.018 65.492,72.242 65.492,73.192 C32.1@64.445,73.192 ; U3.19@63.421,80.8 64.925,80.8 65.75,81.625 v1@65.75,83.113 ; C31.1@64.65,83.125 v1(65.75,83.125) ; v1(67.35,81.55) 68.397,81.55 C1.2@68.45,81.497 69.712,80.235 U1.3@72.217,80.235 ; v1(71.5,32.775) 72.381,32.775 VDR1.1@72.39,32.766 ; U1.30@72.217,66.735 74.99,66.735 v1(75.025,66.7) ; U1.22@72.217,70.735 74.31,70.735 v1(74.575,71) ; U1.14@72.217,74.735 74.465,74.735 v1(74.55,74.65) ; U1.8@72.217,77.735 74.41,77.735 v1(74.675,78) ; v1(76.55,81.175) 76.967,81.592 U1.171@76.967,83.485 ; v1@79.225,35.225 v1(79.275,35.225) 79.248,35.252 C29.1@79.248,36.195 ; U1.166@79.467,83.485 79.467,85.142 80.097,85.772 C21.2@80.097,86.625 81.025,86.625 v1(81.05,86.65) ; v1(80.175,29.825) 80.175,30.01 U6.4@80.772,30.607 ; v1(81.7,81.175) 82.467,81.942 U1.160@82.467,83.485 ; v1(81.875,59.75) 81.967,59.658 U1.60@81.967,57.485 ; C20.2@84.553,86.65 84.967,86.236 U1.155@84.967,83.485 ; v1(84.975,36.15) 85.807,36.15 C33.1@85.852,36.195 ; VDR2.1@86.555,28.257 86.555,26.415 J5.4@86.872,26.098 ; v1(86.675,59.675) 86.967,59.383 U1.70@86.967,57.485 ; C18.2@87.578,86.65 87.578,86.222 88.967,84.833 U1.147@88.967,83.485 ; v1(90.025,81.225) 90.467,81.667 U1.144@90.467,83.485 ; U1.140@92.467,83.485 92.467,81.433 v1(92.625,81.275) ; v1(93.05,55.325) 93.467,55.742 U1.83@93.467,57.485 ; v1(95.8,69.5) 96.065,69.235 U1.108@98.217,69.235 ; v1(95.85,67) 95.85,67.425 96.66,68.235 U1.106@98.217,68.235 U1.105@98.217,67.735 ; v1(95.875,74.6) 96.24,74.235 U1.118@98.217,74.235 ; v1(95.975,77.325) 96.385,77.735 U1.125@98.217,77.735 ; v1(96,60.975) 96.26,61.235 U1.92@98.217,61.235 ; U1.120@98.217,75.235 102.368,75.235 C10.2@102.575,75.028 103.847,75.028 v1(103.85,75.025) ; C34.1@100.154,45.498 100.154,44.571 v1(100.175,44.55) ; Y1.2@102.2,63.625 102.2,62.225 102.45,61.975 105.2,61.975 107.4,64.175 C26.1@107.4,65.4 107.4,66.475 107.15,66.725 105.1,66.725 v1(105.025,66.65) ; v1(102.375,31.3) R37.1@103.2,31.3 ; C27.1@102.743,86.614 103.711,86.614 v1(103.725,86.6) ; U5.4@104.345,51.34 107.015,51.34 107.1,51.425 ; C30.1@105.65,45.6 105.65,44.65 v1(105.7,44.6) ; 107.625,89.175 v1@107.625,91.2 ; U15.7@109.347,86.614 108.486,86.614 107.625,87.475 107.625,89.154 U15.5@109.347,89.154 ; U15.4@109.347,90.424 108.401,90.424 v1@107.625,91.2 ; U15.2@109.347,92.964 107.789,92.964 107.625,92.8 v1@107.625,91.2 ; C52.1@110.744,97.536 110.744,96.806 110.925,96.625 112.065,96.625 U14.1@112.361,96.921 ; R18.1@113,58.4 v1(113,59.6) ; LED4.2@119.105,58.698 119.35,58.943 119.35,60.15 ; K1.1@121.575,92.525 v1(123.475,92.525) ; U10.24@127.597,84.025 U10.24@127.758,84.186 ; U10.2@139.897,85.225 U10.2@139.958,85.286 138.964,85.286 138.05,86.2 138.05,90.425 138.411,90.786 U10.7@139.958,90.786 ; v1@141.614,90.786 v1(141.625,90.775) ; LED5.2@145.345,85.14 146.515,85.14 v1(146.525,85.15) ; U1.105@98.217,67.735 96.885,67.735 96.725,67.575 96.725,66.925 96.915,66.735 U1.103@98.217,66.735 100.54,66.735 101.475,65.8 103.975,65.8 104.4,66.225 Y1.4@104.4,67.325 104.4,69.1 104.25,69.25 C25.1@103.65,69.25 103.65,69.8 103.45,70 101.475,70 100.725,69.25 100.725,68.225 100.2,67.7 98.252,67.7 U1.105@98.217,67.735
  Top Layer w0.508: J9.3@27.495,47.062 VDR7.1@29.408,45.149 ; VDR3.1@39,55.225 v1(40.15,55.225) ; C53.1@50.673,93.726 U16.3@55.753,93.726 ; J11.12@93,26.06 J11.10@95.54,26.06 J11.8@98.08,26.06 99.39,24.75 101.85,24.75 J11.4@103.16,26.06 ; U15.2@109.347,92.964 U15.1@109.347,94.234 ; J8.3@109.5,25.495 113.45,25.495 J10.3@113.5,25.445 ; v1(124.95,82.975) 124.85,83.075 C40.1@124.85,84.025 U10.24@127.597,84.025 ; U10.7@139.958,90.786 v1@141.614,90.786
  Top Layer w0.762: J1.39@33.817,65.233 J1.36@33.817,67.773 J1.33@33.817,70.313 J1.30@33.817,72.853 J1.27@33.817,75.393 J1.24@33.817,77.933 J1.21@33.817,80.473 J1.18@33.817,83.013 J1.15@33.817,85.553 J1.12@33.817,88.093 J1.9@33.817,90.633 J1.6@33.817,93.173 J1.3@33.817,95.713 ; U7.6@42.981,39.4 42.981,37.131 v1@42.95,37.1 ; U7.10@53.081,38.1 52.081,37.1 v1@42.95,37.1 ; U7.10@53.981,28.5 52.031,30.45 40.45,30.45 38.481,28.481 U7.10@38.481,38.1 39.481,37.1 v1@42.95,37.1 ; C51.2@109.9,50.7 110.025,50.825 110.025,53.875 110.35,54.2 C50.1@111.7,54.2 ; 112.3,40.5 112.3,42.57 pad.0@113.136,43.406 ; 116.3,40.1 116.311,40.111 pad.1@116.311,43.406 119.906,43.406 121.3,44.8 C49.2@121.3,50.7 121.3,53.4 120.6,54.1 C48.1@119.1,54.1 ; C47.1@118.8,62.6 121.426,62.6 C45.2@121.876,63.05 122.892,62.034 C42.1@125.686,62.034 ; v1(126.125,98.225) 126.164,98.186 U10.13@127.758,98.186 138.411,98.186 ; 134.075,38.225 134.556,38.706 TP9.1@134.556,47.118 ; C39.2@143.325,95.447 142.786,95.986 U10.10@139.958,95.986 138.489,95.986 137.986,96.489 137.986,97.761 138.411,98.186 ; 151.55,98.175 149.775,98.175 149.338,98.612 JP2.1@149.338,100.852 ; v1@153.675,96.1 153.561,95.986 153.772,95.775 C38.2@154.678,95.775 ; JP1.1@154.545,100.852 JP1.1@151.595,100.852 JP2.1@149.338,100.852 ; 138.411,98.186 U10.12@139.958,98.186 139.958,99.733 141.077,100.852 JP2.1@146.388,100.852 JP2.1@149.338,100.852
  Bottom Layer w0.254: v1(74.55,74.65) 75.403,74.65 C3.2@75.75,74.997 ; v1(74.575,71) 75.553,71 C5.2@75.775,71.222 ; v1(74.675,78) 75.503,78 C8.2@75.775,78.272 ; v1(75.025,66.7) C7.2@75.9,66.7 ; C7.2@75.975,66.778 77.506,66.778 C14.2@77.55,66.822 ; C15.2@76.353,80.225 76.55,80.422 v1(76.55,81.175) ; C11.2@81.653,80.3 81.7,80.347 v1(81.7,81.175) ; C9.2@81.678,60.6 81.678,59.947 v1(81.875,59.75) ; C13.2@86.553,60.65 86.553,59.797 v1(86.675,59.675) ; C6.2@89.778,80.375 89.778,80.978 v1(90.025,81.225) ; C17.2@92.528,80.35 92.625,80.447 v1(92.625,81.275) ; C19.2@93.05,54.297 v1(93.05,55.325) ; C4.2@94.825,66.878 95.728,66.878 v1(95.85,67) ; C22.2@94.825,69.578 95.722,69.578 v1(95.8,69.5) ; C12.2@94.85,74.722 95.753,74.722 v1(95.875,74.6) ; C16.2@94.875,77.228 94.972,77.325 v1(95.975,77.325) ; C2.2@95.075,60.678 95.703,60.678 v1(96,60.975) ; VDR9.1@101.525,31.3 v1(102.375,31.3)
  Bottom Layer w0.508: J8.3@109.5,25.495 109.642,25.353 VDR6.2@111.425,25.353 111.517,25.445 J10.3@113.5,25.445 113.62,25.325 VDR5.1@115.35,25.325
  other v1: 45.625,30.475 48.95,30.475 42.925,30.5 135.4,35.1 135.425,36.15 112.275,36.225 45.575,37.1 135.4,37.1 48.925,37.125 42.95,37.2 135.425,38.15 112.275,38.9 135.4,39.175 135.425,40.225 121.375,47.175 42.7,48.225 121.35,48.375 107.225,50.1 107.225,50.975 107.25,51.925 107.275,52.85 118.825,60.325 119.9,60.325 46.1,60.875 118.85,61.275 119.9,61.275 105,67.65 124.075,68.55 105,68.625 124.1,69.4 65.5,73.2 88.05,85.725 84.925,85.75 107.625,90.35 107.625,91.15 52.175,93.75 153.675,95.575 153.85,96.25 111.325,96.625 152.55,98.175 151.825,98.225 142.4,101.95 143.375,101.95 139.625,101.975 140.575,101.975 141.475,101.975 144.525,102 146.95,102.1 148.175,102.125 150.7,102.125 145.825,102.15 149.525,102.2 152.15,102.2 153.375,102.2 154.425,102.325
GPS_C\S\: U1.99 U10.18 | length 49.7
  Top Layer w0.254: U1.99@98.217,64.735 100.14,64.735 100.95,63.925 100.95,62.475 101.856,61.569 106.152,61.569 108.7,64.116 108.7,70.671 114.933,76.904 114.933,80.406 125.313,90.786 U10.18@127.758,90.786
GPS_MISO: U1.97 U10.20 | length 48.5
  Top Layer w0.254: U1.97@98.217,63.735 99.79,63.735 100.137,63.388 100.137,62.013 101.394,60.756 106.489,60.756 110.131,64.398 110.131,70.953 115.746,76.567 115.746,79.246 125.086,88.586 U10.20@127.758,88.586
GPS_MOSI: U1.96 U10.21 | length 48.3
  Top Layer w0.254: U1.96@98.217,63.235 99.615,63.235 99.731,63.119 99.731,61.628 101.009,60.349 106.657,60.349 110.538,64.23 110.538,70.784 116.153,76.399 116.153,79.078 124.561,87.486 U10.21@127.758,87.486
GPS_SLK: U1.98 U10.19 | length 49.2
  Top Layer w0.254: U1.98@98.217,64.235 99.965,64.235 100.544,63.656 100.544,62.256 101.638,61.162 106.321,61.162 109.725,64.566 109.725,71.121 115.34,76.736 115.34,80.04 124.986,89.686 U10.19@127.758,89.686
I\S\E\N\S\O\R\_\C\S\: J3.6 R12.2 RP1.4 | length 44.6
  Top Layer w0.254: R12.2@65.9,31.078 65.9,28.59 J3.6@65.915,28.575 65.915,26.86 67.1,25.675 74.725,25.675 76.2,27.15 76.2,37.7 88.529,50.029 RP1.4@88.529,51.054